# EAGLE board TinyNES_J3_Spacer (EAGLE 9.6.2)

Size 11.9 x 12.3 mm. Coordinates in mm from the lower left corner, seen from the top.
Outline: 1.2,0 0,1.2 0,3.5 1.2,4.7 1.2,11.5 2,12.3 10.6,12.3 11.4,11.5 11.4,4 11.9,3.5 11.9,0.5 11.4,0
Copper layers (1*16): Top 0.035mm / dielectric 1.5mm / Bottom 0.035mm
Design rules "default": minimum track width 6mil, minimum drill 0.35mm, track to track 6mil, track to pad 6mil, pad to pad 6mil, via to via 6mil, smd to smd 6mil, copper to edge 40mil, drill to drill 6mil, minimum pad ring 10mil, minimum via ring 8mil, stop-mask expansion 4mil, vias tented up to drill 0mil, thermal gap 10mil

## Footprints (pad centres in the part's own frame; a part is rotated, then mirrored left to right if it is on the bottom)
SJ-43514-SPACER = hole 1.1: 2.9,0; 7.9,0; 2.9,-4.5; 2.9,4.8; 7.9,-3.6; 11,1.6

## Placement (x,y rotation side)
E$1  [SJ-43514-SPACER]  6.1,0 90 top

## Library data of the parts
E$1 = TinyNES_Library

## Text on the board
tPlace: UP | J3 SPACER